# Altium PCB PCB5 (1).PcbDoc
Units mm, origin at the board's own origin, x right, y up, seen from the top; angles counter-clockwise.
Board outline 200 x 150 mm, 4 copper layers (Top Layer, Internal Plane 1, Internal Plane 2, Bottom Layer), stack 0.462 mm thick; 20 components, 0 nets, 160 pads, 0 vias.
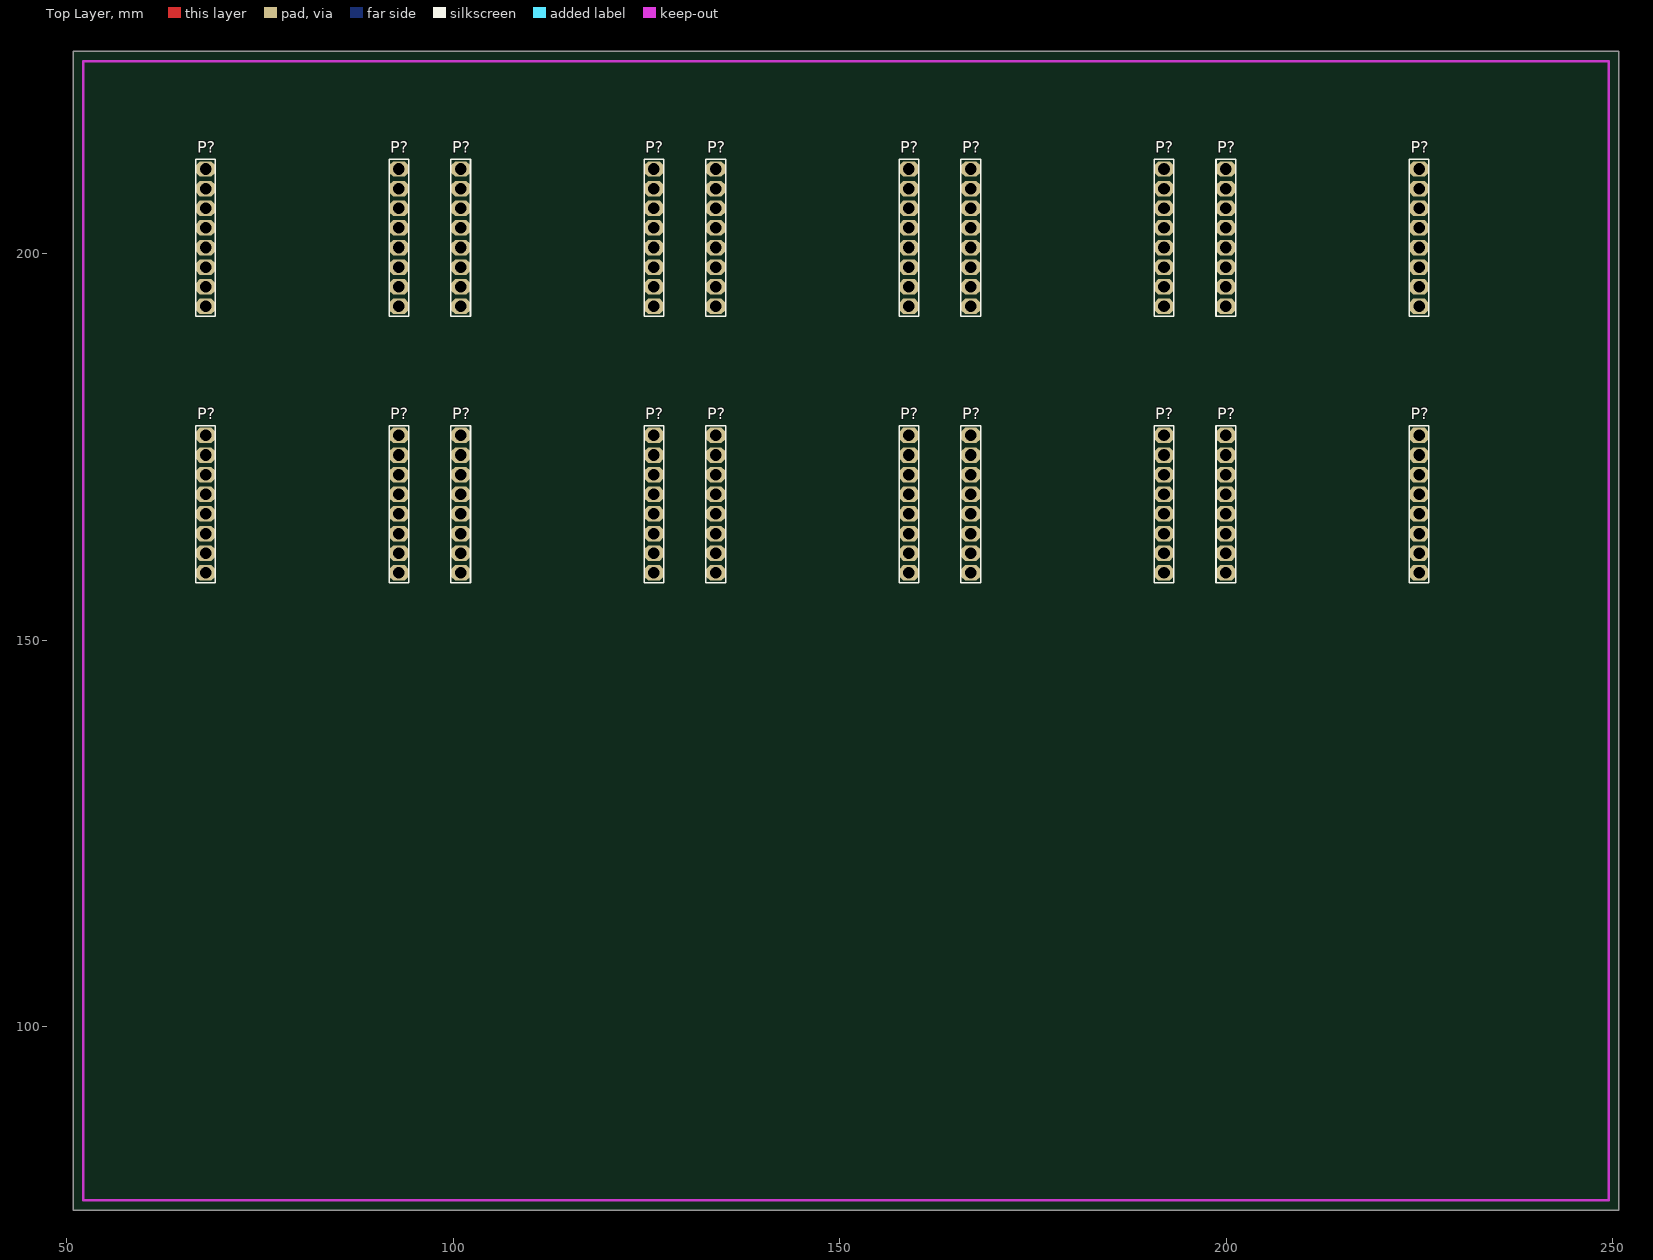
[diagram p0: Top Layer view]
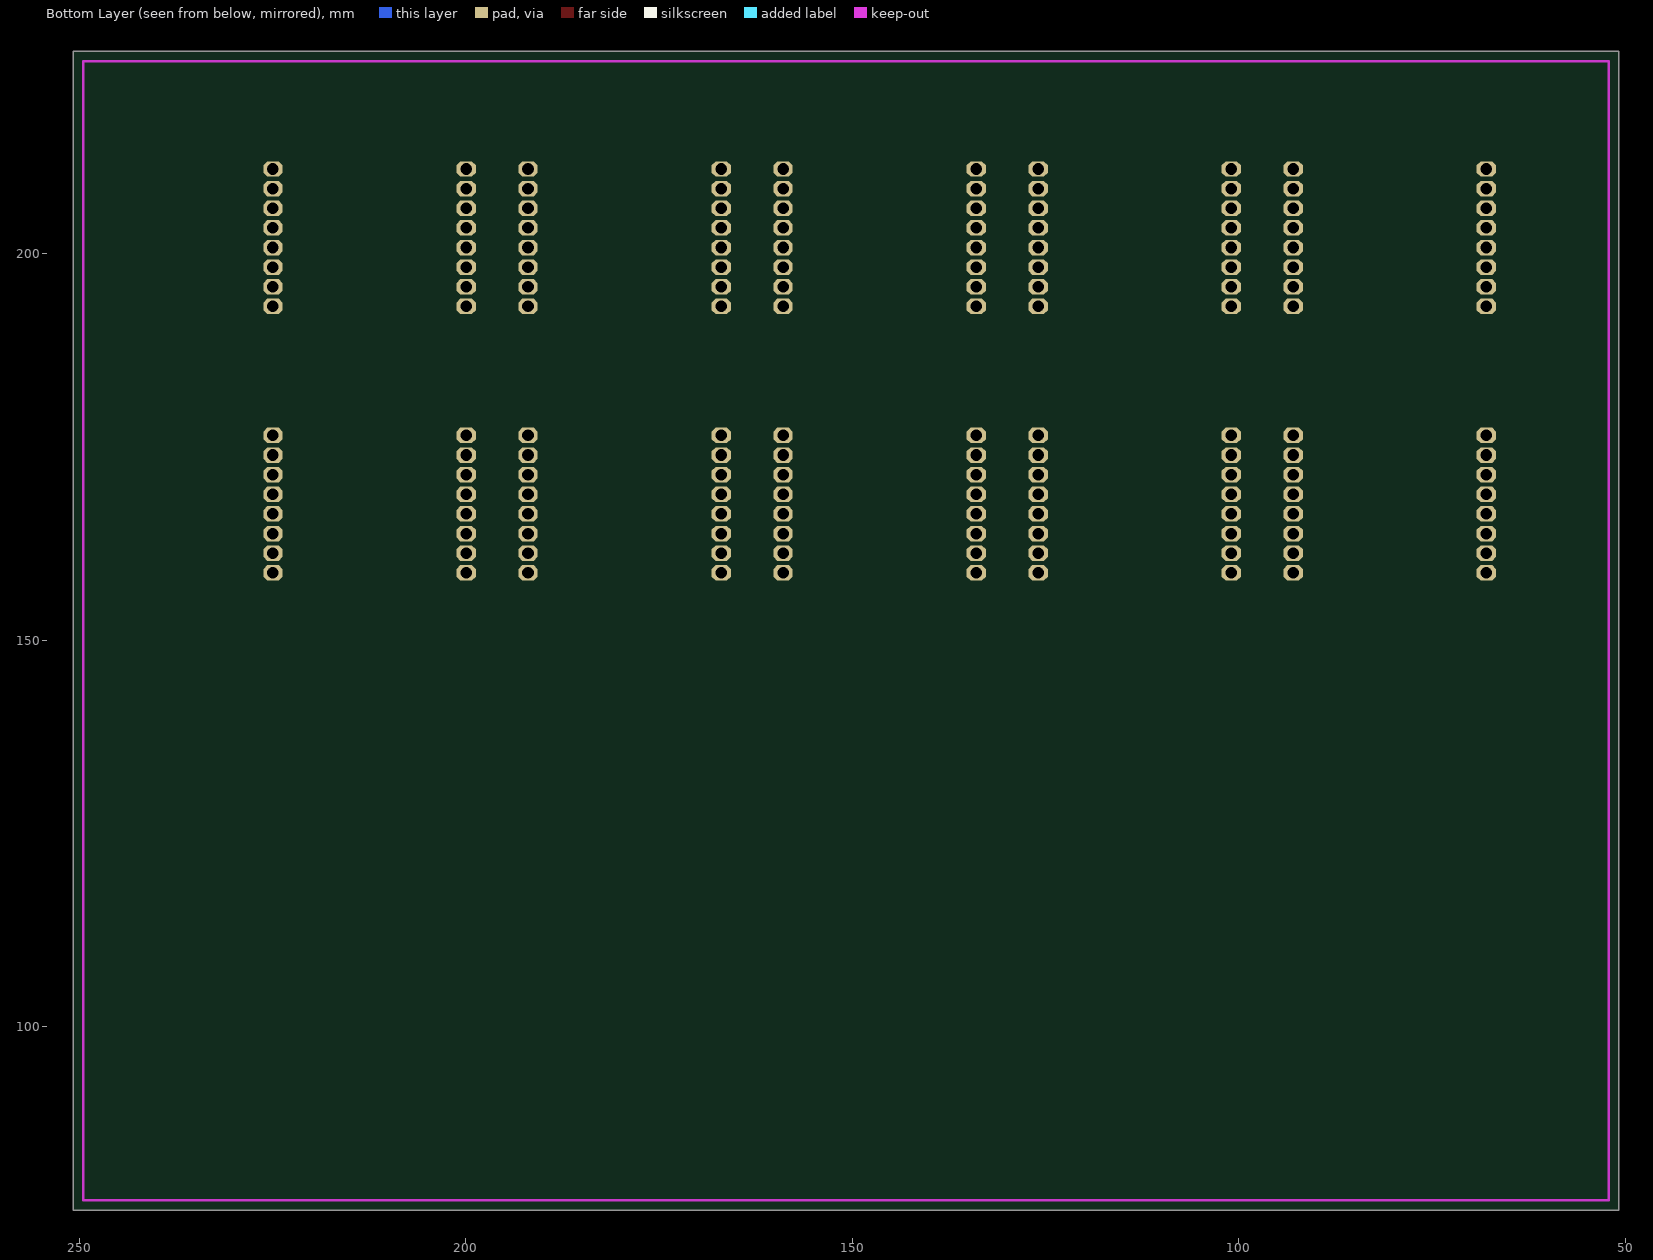
[diagram p1: Bottom Layer view, seen from below]
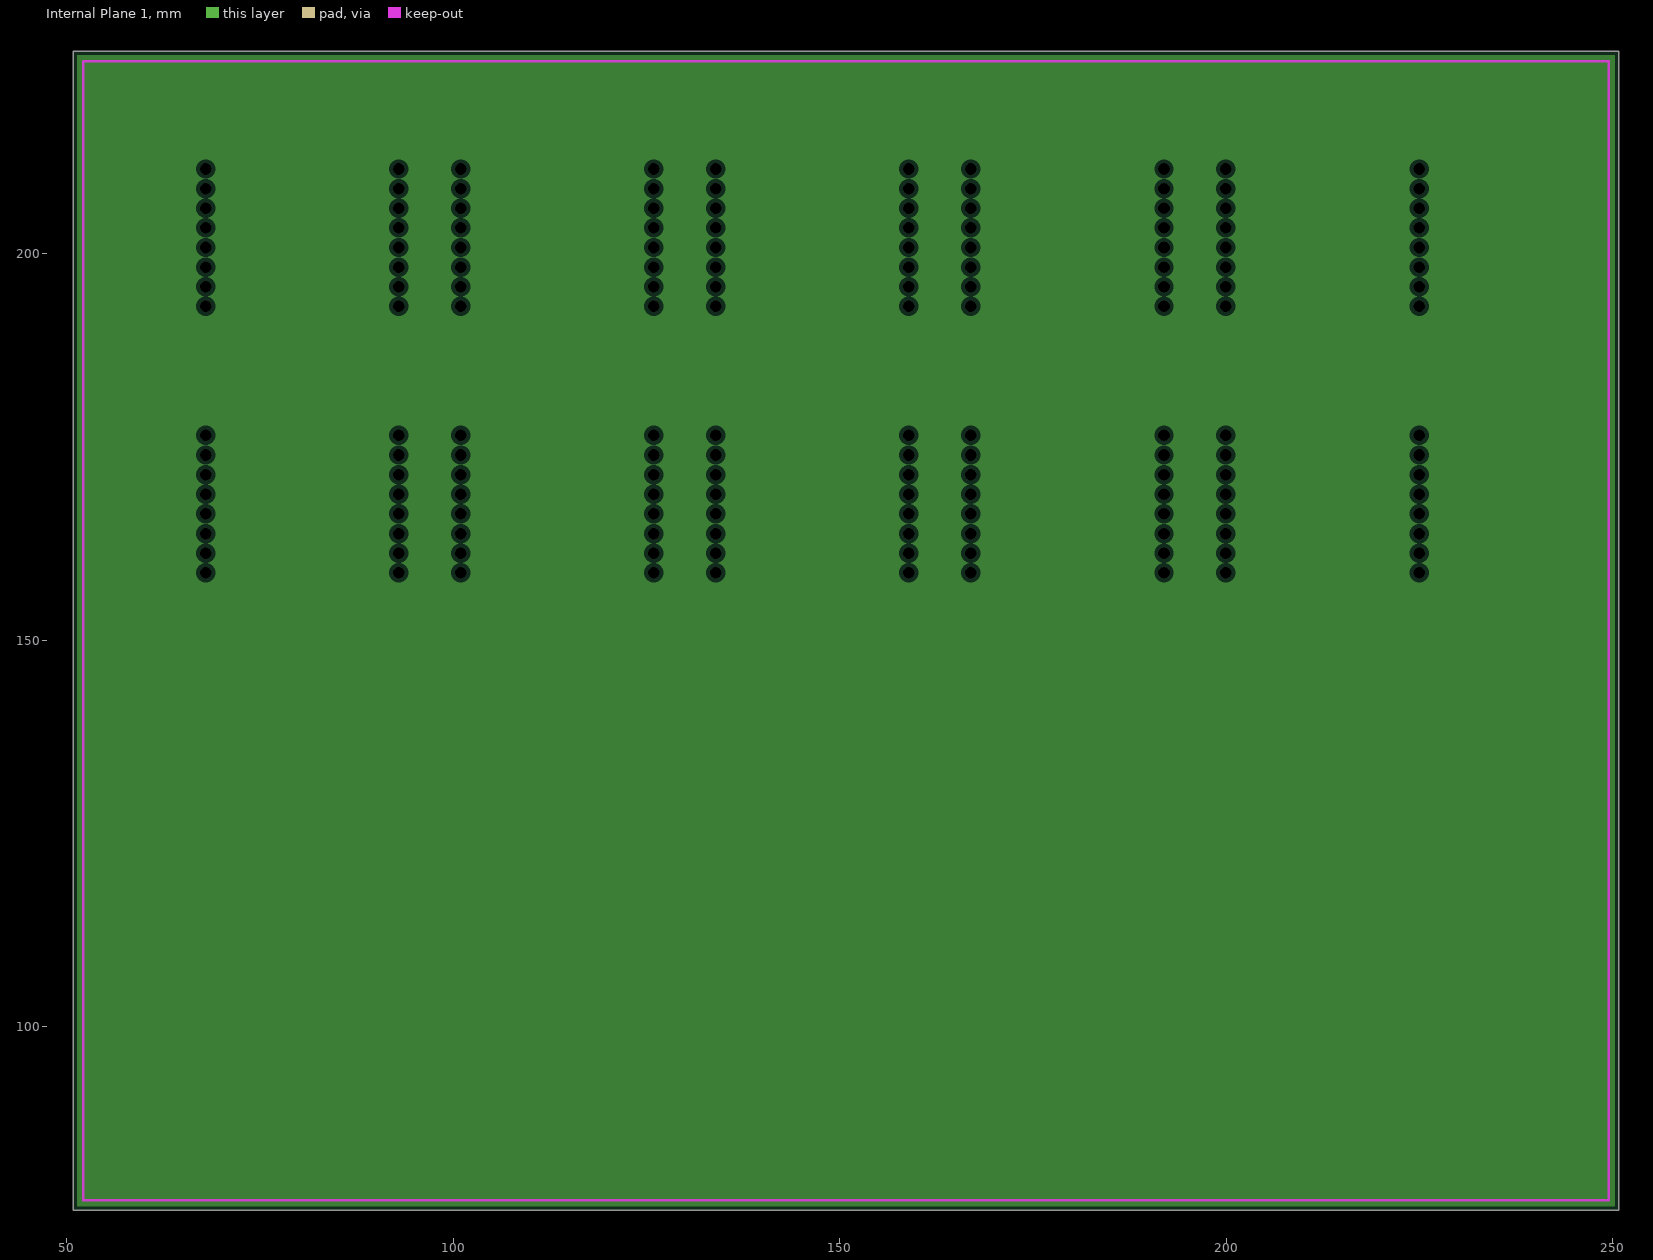
[diagram p2: Internal Plane 1, clearances drawn from the general rule]
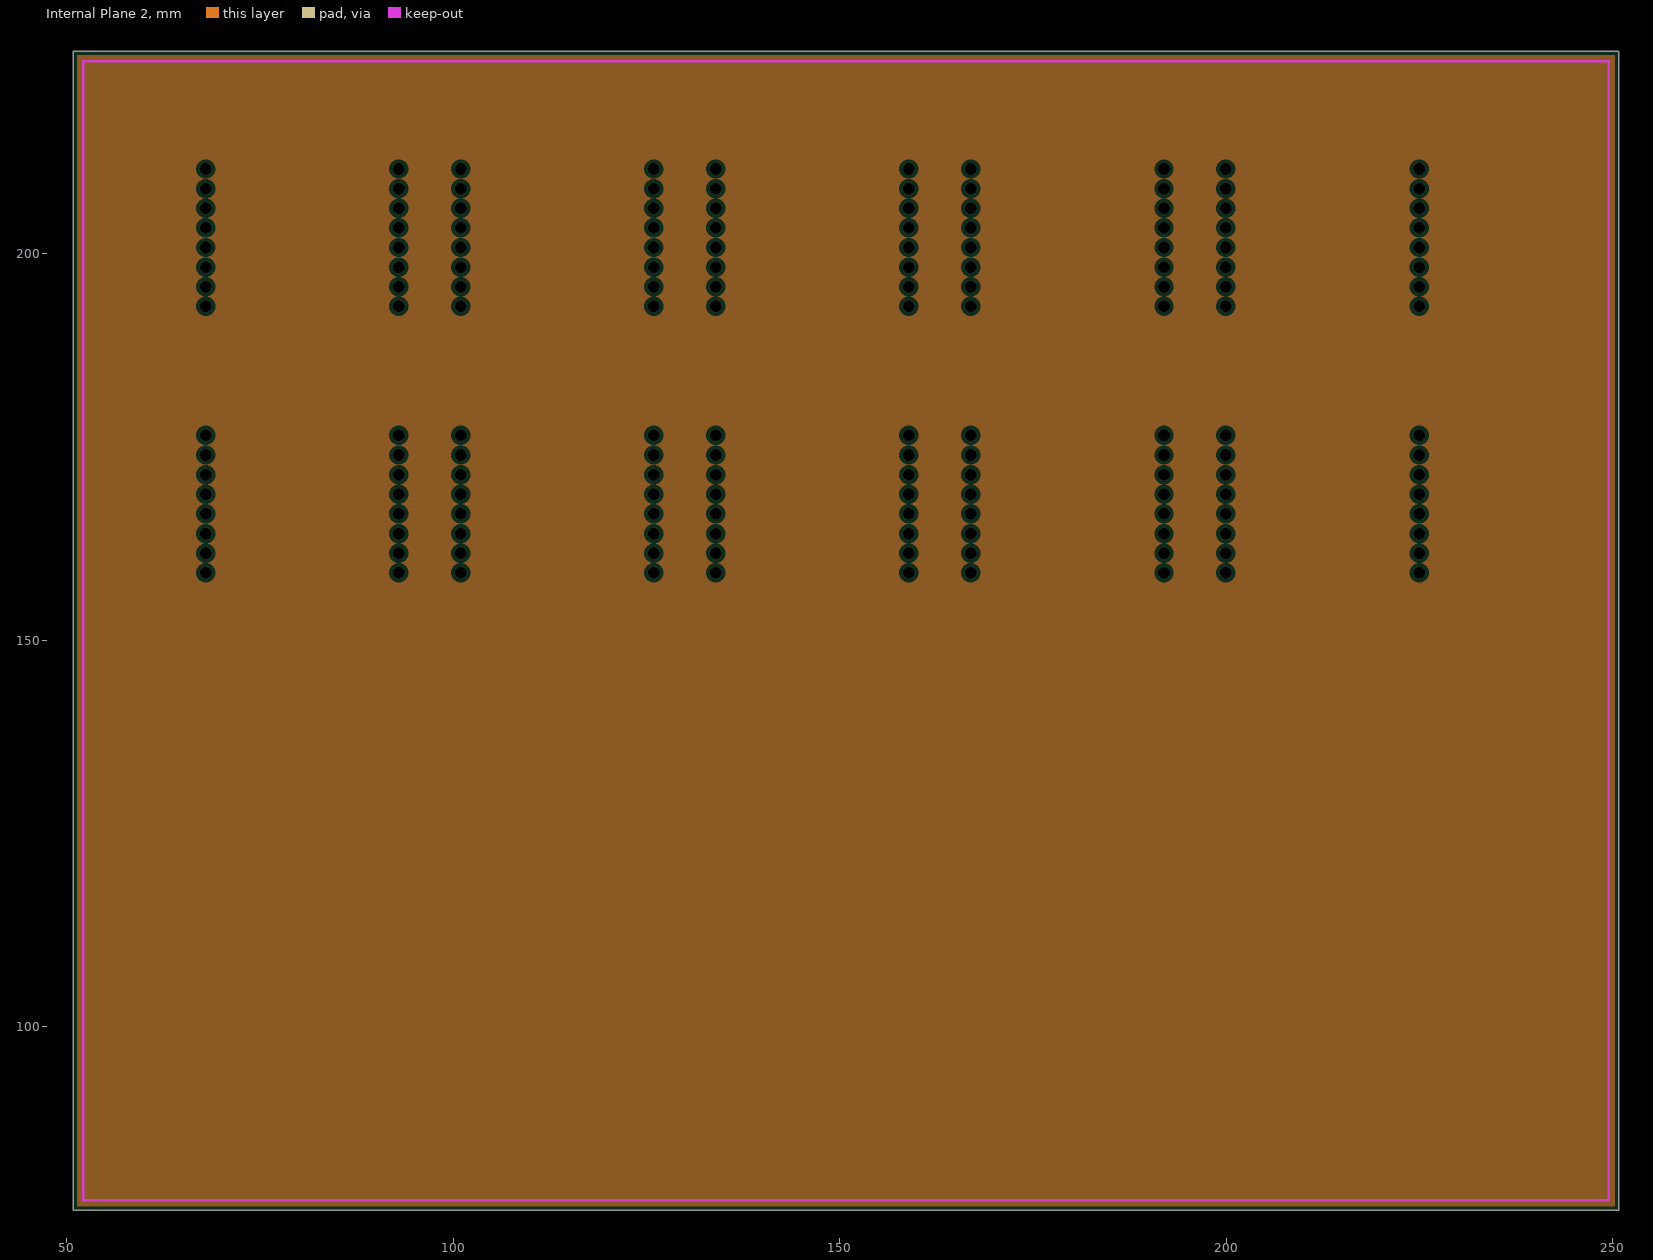
[diagram p3: Internal Plane 2, clearances drawn from the general rule]

## Layer stack, top to bottom
Top Solder: solder mask 0.0102, Solder Resist, Dk 3.5
Top Layer: signal copper 0.0356
Internal Plane 1: plane copper 0.0356
Internal Plane 2: plane copper 0.0356
Dielectric 1: dielectric 0.32, FR-4, Dk 4.8
Bottom Layer: signal copper 0.0356
Bottom Solder: solder mask 0.0102, Solder Resist, Dk 3.5

## Board outline
50.8,76.2 250.8,76.2 250.8,226.2 50.8,226.2

## Design rules (kind name [scope] priority, off if disabled: settings)
Clearance [All] p1: gap=0.2
PlaneClearance [All] p1: clearance=0.508
PlaneConnect [All] p1: planeconnectstyle=Relief reliefexpansion=0.508 reliefentries=4 reliefconductorwidth=0.254 reliefairgap=0.254
PolygonConnect [All] p1: connectstyle=Relief reliefconductorwidth=0.254 reliefentries=4 polygonreliefangle="90 Angle" airgapwidth=0.254
RoutingVias [All] p1: holewidth=1.5 width=2 viastyle="Through Hole" minholewidth=0.711 minwidth=1.27 maxholewidth=0.711 maxwidth=1.27
SolderMaskExpansion [All] p1: expansion=0.102
Width [All] p1: maxlimit=0.2 minlimit=0.2 preferedwidth=0.2
28 further rules are at their usual default settings.

## Components (designator, comment, footprint, x,y, rotation, side; value= is the part's Value field where it differs from the comment)
P? "Header 8" HDR1X8 166.945,158.7 r90 top
P? "Header 8" HDR1X8 191.945,158.7 r90 top
P? "Header 8" HDR1X8 199.945,158.7 r90 top
P? "Header 8" HDR1X8 67.945,158.7 r90 top
P? "Header 8" HDR1X8 158.945,158.7 r90 top
P? "Header 8" HDR1X8 199.945,193.167 r90 top
P? "Header 8" HDR1X8 92.945,193.167 r90 top
P? "Header 8" HDR1X8 92.945,158.7 r90 top
P? "Header 8" HDR1X8 166.945,193.167 r90 top
P? "Header 8" HDR1X8 158.945,193.167 r90 top
P? "Header 8" HDR1X8 133.945,193.167 r90 top
P? "Header 8" HDR1X8 100.945,193.167 r90 top
P? "Header 8" HDR1X8 67.945,193.167 r90 top
P? "Header 8" HDR1X8 125.945,193.167 r90 top
P? "Header 8" HDR1X8 224.945,193.167 r90 top
P? "Header 8" HDR1X8 133.945,158.7 r90 top
P? "Header 8" HDR1X8 100.945,158.7 r90 top
P? "Header 8" HDR1X8 125.945,158.7 r90 top
P? "Header 8" HDR1X8 224.945,158.7 r90 top
P? "Header 8" HDR1X8 191.945,193.167 r90 top

## Footprints (in the part's own frame and the unit in brackets; to place one, negate y for a bottom-side part, rotate by r counter-clockwise, add the part's x,y. Pads: shape width x height; smd on the part's side, far side on the other; paste and mask are expansions set on the pad)
HDR1X8 [mm] "Connector; Header; 8 Position"
  oct 2x2.5 hole 1.5: 1(0,0) 2(2.54,0) 3(5.08,0) 4(7.62,0) 5(10.16,0) 6(12.7,0) 7(15.24,0) 8(17.78,0)
  silkscreen extent -1.27,-1.27 19.05,1.27

## Part data
P? P? P? P? P? P? P? P? P? P? P? P? P? P? P? P? P? P? P? P?: "Header, 8-Pin"

## Nets (pads, with @x,y where several pads share a name; then routed paths per layer and width w, separated by ;. In a path a pad name is that pad's centre, name@x,y a point inside that pad or via, vN(x,y) a via of type N, cw(c..) or ccw(c..) an arc to the next point about the centre after c; other vN are vias at no path point)
pads on no net: P?.1 P?.2 P?.3 P?.4 P?.5 P?.6 P?.7 P?.8

## Keep-outs
Keep-Out Layer:
  lines w0.3: 52.1,77.5 249.5,77.5 249.5,224.9 52.1,224.9 52.1,77.5

## Silkscreen, mask and mechanical layers (free items; w line width, h text height)
Drill Drawing:
  text ".LEGEND" at 255.88,81.28 h1.52
  text "Drill Drawing." at 255.88,78.74 h1.52

## Dimensions
52.1,77.5 to 249.5,77.5 on Mechanical 1
52.1,77.5 to 52.1,224.9 on Mechanical 1